# EAGLE board remote (EAGLE 6.4)
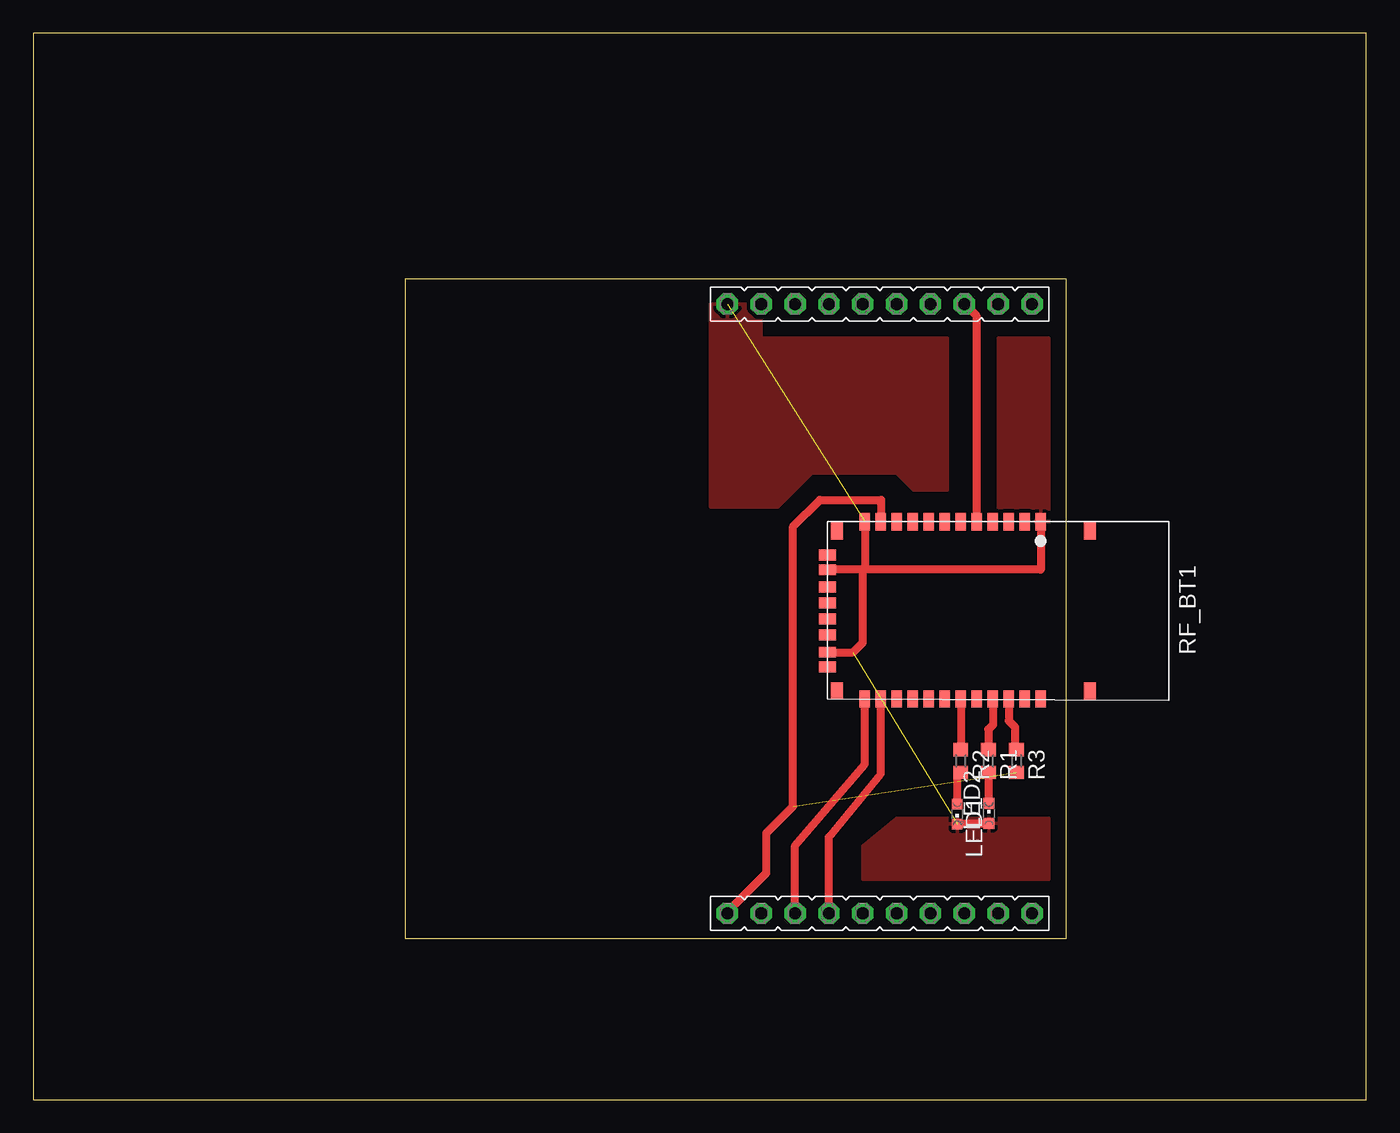
[diagram p0: board, top side]

Size 100 x 80 mm. Coordinates in mm from the lower left corner, seen from the top.
Outline: 0,0 100,0 100,80 0,80 0,0
Copper layers (1*16): Top 0.035mm / dielectric 1.5mm / Bottom 0.035mm
Design rules "default *": minimum track width 10mil, minimum drill 24mil, track to track 12mil, track to pad 16mil, pad to pad 10mil, via to via 10mil, smd to smd 8mil, copper to edge 40mil, drill to drill 8mil, minimum pad ring 10mil, minimum via ring 8mil, stop-mask expansion 4mil, vias tented up to drill 0mil, thermal gap 10mil

## Footprints (pad centres in the part's own frame; a part is rotated, then mirrored left to right if it is on the bottom)
CHIPLED_0603 = smd 0.8 x 0.8: A 0,-0.75; C 0,0.75
R0603 = smd 1 x 1.1: 1 -0.85,0; 2 0.85,0
RN42_CUST_PAK = smd 1.3 x 0.8: 1 0,16; 2 0,14.8; 3 0,13.6; 4 0,12.4; 5 0,11.2; 6 0,10; 7 0,8.8; 8 0,7.6; 9 0,6.4; 10 0,5.2; 11 0,4; 12 0,2.8; 13 13.3,2.8; 14 13.3,4; 15 13.3,5.2; 16 13.3,6.4; 17 13.3,7.6; 18 13.3,8.8; 19 13.3,10; 20 13.3,11.2; 21 13.3,12.4; 22 13.3,13.6; 23 13.3,14.8; 24 13.3,16 | smd 0.8 x 1.3: 28 9.8,0; 29 3.6,0; 30 10.9,0; 31 8.5,0; 32 7.3,0; 33 6.1,0; 34 4.9,0; 35 2.5,0 | smd 1.3 x 0.9: P$1 0.7,0.7; P$2 12.7,0.7; P$3 12.7,19.7; P$4 0.7,19.7
LAUNCHPAD-50MM-LEFT = drill 0.914 pad 1.6 octagon: GND 24.13,48.26; P1.0 26.67,2.54; P1.1 29.21,2.54; P1.2 31.75,2.54; P1.3 34.29,2.54; P1.4 36.83,2.54; P1.5 39.37,2.54; P1.6 39.37,48.26; P1.7 36.83,48.26; P2.0 41.91,2.54; P2.1 44.45,2.54; P2.2 46.99,2.54; P2.3 46.99,48.26; P2.4 44.45,48.26; P2.5 41.91,48.26; P2.6 26.67,48.26; P2.7 29.21,48.26; RST 34.29,48.26; TEST 31.75,48.26; VCC 24.13,2.54

## Placement (x,y rotation side)
LED1  CNCT  [CHIPLED_0603]  69.32,21.42 180 top
LED2  MODE  [CHIPLED_0603]  71.69,21.48 0 top
R1  220  [R0603]  71.65,25.4 270 top
R2  220  [R0603]  69.58,25.4 270 top
R3  0  [R0603]  73.76,25.4 270 top
RF_BT1  RN42BLUE  [RN42_CUST_PAK]  59.58,43.35 270 top
U$1  LAUNCHPAD-50MM-LEFT  [LAUNCHPAD-50MM-LEFT]  27.94,11.43 0 top

## Library data of the parts
LED1 LED2 R1-R3 = adafruit
RF_BT1 = RN42
U$1 = TI_launchpad

## Nets
GND: LED1.C LED2.A RF_BT1.1 RF_BT1.12 RF_BT1.28 RF_BT1.29 U$1.GND
N$1: R1.1 RF_BT1.21
N$2: R2.1 RF_BT1.19
N$3: LED2.C R1.2
N$4: LED1.A R2.2
N$5: R3.1 RF_BT1.22
RESET: RF_BT1.5 U$1.P2.5
RX: RF_BT1.13 U$1.P1.1
TX: RF_BT1.14 U$1.P1.2
VCC: R3.2 RF_BT1.11 U$1.VCC

## Tracks (layer width: path | path; a pad name or v marks a point on that pad's centre or on a via)
GND  (2 unrouted)
  Top 0.61: 71.64,20.67 LED1.C | RF_BT1.1 75.58,39.76 62.38,39.76 | 62.38,39.76 62.23,39.76 | 62.23,39.76 RF_BT1.29 | RF_BT1.12 62.38,39.76 | RF_BT1.28 61.49,33.55 62.23,34.29 62.23,39.76
  pour Top: 76.2,57.15 72.39,57.15 72.39,43.18 76.2,43.18
  pour Top: 54.61,59.69 54.61,57.15 68.58,57.15 68.58,45.72 66.04,45.72 64.77,46.99 58.42,46.99 55.88,44.45 50.8,44.45 50.8,59.69
  pour Top: 62.23,16.51 76.2,16.51 76.2,21.08 64.77,21.08 62.23,19.05
N$1
  Top 0.61: RF_BT1.21 72,30.03 72,28.12 71.65,27.77 R1.1
N$2
  Top 0.61: RF_BT1.19 69.58,26.27 R2.1
N$3
  Top 0.61: LED2.C 71.69,24.5 R1.2
N$4
  Top 0.61: LED1.A 69.33,24.15 R2.2
N$5
  Top 0.61: RF_BT1.22 73.17,28.43 73.66,27.94 73.66,26.35 R3.1
RESET
  Top 0.61: RF_BT1.5 70.78,58.77 U$1.P2.5
RX
  Top 0.61: U$1.P1.1 57.15,19.05 62.38,25.15 RF_BT1.13
TX
  Top 0.61: U$1.P1.2 59.69,19.68 63.58,24.45 RF_BT1.14
VCC  (1 unrouted)
  Top 0.61: RF_BT1.11 63.62,43.41 63.62,45 59,45 57,43 57,22 55,20 55,17 52.07,14.07 U$1.VCC